# Altium PCB ADPLL_v1.PcbDoc
Units mil, origin at the board's own origin, x right, y up, seen from the top; angles counter-clockwise.
Board outline 6000 x 4000 mil, 2 copper layers (Top Layer, Bottom Layer); 1 components, 0 nets, 48 pads, 0 vias.
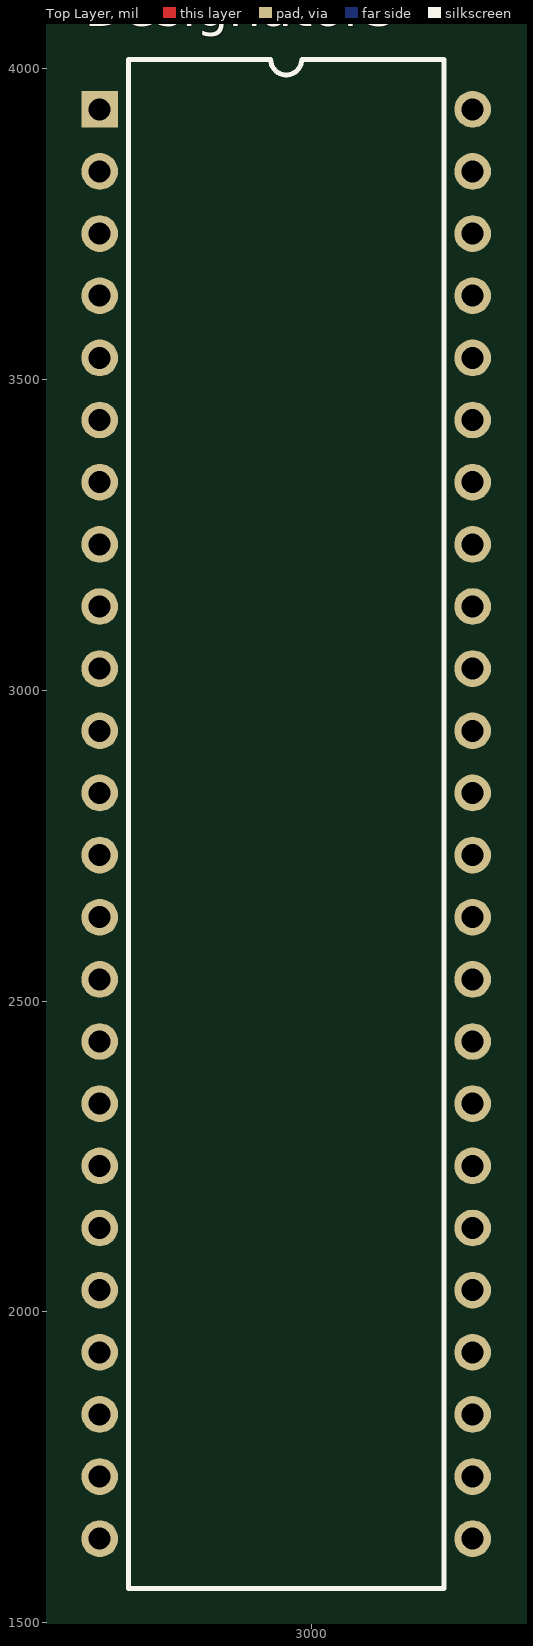
[diagram p0: Top Layer view]
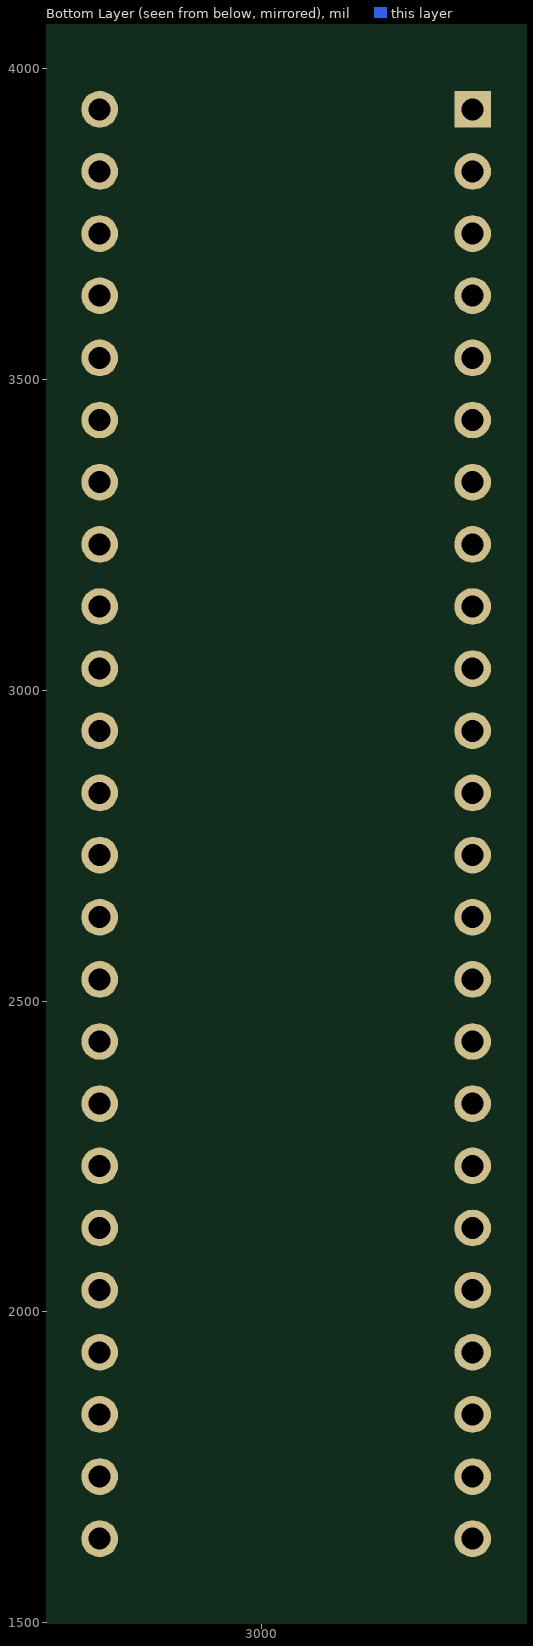
[diagram p1: Bottom Layer view, seen from below]

## Layer stack, top to bottom
Top Solder: solder mask 0.4, Solder Resist, Dk 3.5
Top Layer: signal copper 1.4
Dielectric 1: dielectric 12.6, FR-4, Dk 4.8
Bottom Layer: signal copper 1.4
Bottom Solder: solder mask 0.4, Solder Resist, Dk 3.5

## Board outline
1000,1000 7000,1000 7000,5000 1000,5000

## Design rules (kind name [scope] priority, off if disabled: settings)
Clearance [All] p1: gap=10 ignorepadtopadclearanceinfootprint=FALSE
PolygonConnect [All] p1: connectstyle=Relief reliefconductorwidth=10 reliefentries=4 polygonreliefangle="90 Angle" airgapwidth=10
RoutingVias [All] p1: holewidth=28 width=50 viastyle="Through Hole" minholewidth=28 minwidth=50 maxholewidth=28 maxwidth=50
SolderMaskExpansion [All] p1: expansion=4 istentingtop=FALSE
Width [All] p1: maxlimit=10 minlimit=10 preferedwidth=10
30 further rules are at their usual default settings.

## Components (designator, comment, footprint, x,y, rotation, side; value= is the part's Value field where it differs from the comment)
Designator3 "Comment" "SB48 (DIP48)" 2660,3935 r0 top

## Footprints (in the part's own frame and the unit in brackets; to place one, negate y for a bottom-side part, rotate by r counter-clockwise, add the part's x,y. Pads: shape width x height; smd on the part's side, far side on the other; paste and mask are expansions set on the pad)
"SB48 (DIP48)" [mm] "DIP; 48 Leads; Row Spacing 15.24 mm; Pitch 2.54 mm"
  rect 1.5x1.5 hole 0.9: 1(0,0)
  round 1.5 hole 0.9: 2(0,-2.54) 3(0,-5.08) 4(0,-7.62) 5(0,-10.16) 6(0,-12.7) 7(0,-15.24) 8(0,-17.78) 9(0,-20.32) 10(0,-22.86) 11(0,-25.4) 12(0,-27.94) 13(0,-30.48) 14(0,-33.02) 15(0,-35.56) 16(0,-38.1) 17(0,-40.64) 18(0,-43.18) 19(0,-45.72) 20(0,-48.26) 21(0,-50.8) 22(0,-53.34) 23(0,-55.88) 24(0,-58.42) 25(15.24,-58.42) 26(15.24,-55.88) 27(15.24,-53.34) 28(15.24,-50.8) 29(15.24,-48.26) 30(15.24,-45.72) 31(15.24,-43.18) 32(15.24,-40.64) 33(15.24,-38.1) 34(15.24,-35.56) 35(15.24,-33.02) 36(15.24,-30.48) 37(15.24,-27.94) 38(15.24,-25.4) 39(15.24,-22.86) 40(15.24,-20.32) 41(15.24,-17.78) 42(15.24,-15.24) 43(15.24,-12.7) 44(15.24,-10.16) 45(15.24,-7.62) 46(15.24,-5.08) 47(15.24,-2.54) 48(15.24,0)
  silkscreen extent 1.17,-60.46 14.07,2.04

## Nets (pads, with @x,y where several pads share a name; then routed paths per layer and width w, separated by ;. In a path a pad name is that pad's centre, name@x,y a point inside that pad or via, vN(x,y) a via of type N, cw(c..) or ccw(c..) an arc to the next point about the centre after c; other vN are vias at no path point)
pads on no net: Designator3.1 Designator3.2 Designator3.3 Designator3.4 Designator3.5 Designator3.6 Designator3.7 Designator3.8 Designator3.9 Designator3.10 Designator3.11 Designator3.12 Designator3.13 Designator3.14 Designator3.15 Designator3.16 Designator3.17 Designator3.18 Designator3.19 Designator3.20 Designator3.21 Designator3.22 Designator3.23 Designator3.24 Designator3.25 Designator3.26 Designator3.27 Designator3.28 Designator3.29 Designator3.30 Designator3.31 Designator3.32 Designator3.33 Designator3.34 Designator3.35 Designator3.36 Designator3.37 Designator3.38 Designator3.39 Designator3.40 Designator3.41 Designator3.42 Designator3.43 Designator3.44 Designator3.45 Designator3.46 Designator3.47 Designator3.48